# Altium PCB MOD-ADC-10.PCBDOC (part 4 of 4)
Units mm, origin at the board's own origin, x right, y up, seen from the top; angles counter-clockwise.
Board outline 80 x 100 mm, 4 copper layers (L1, P2, L3, L4), stack 1.512 mm thick; 199 components, 170 nets, 717 pads, 298 vias.
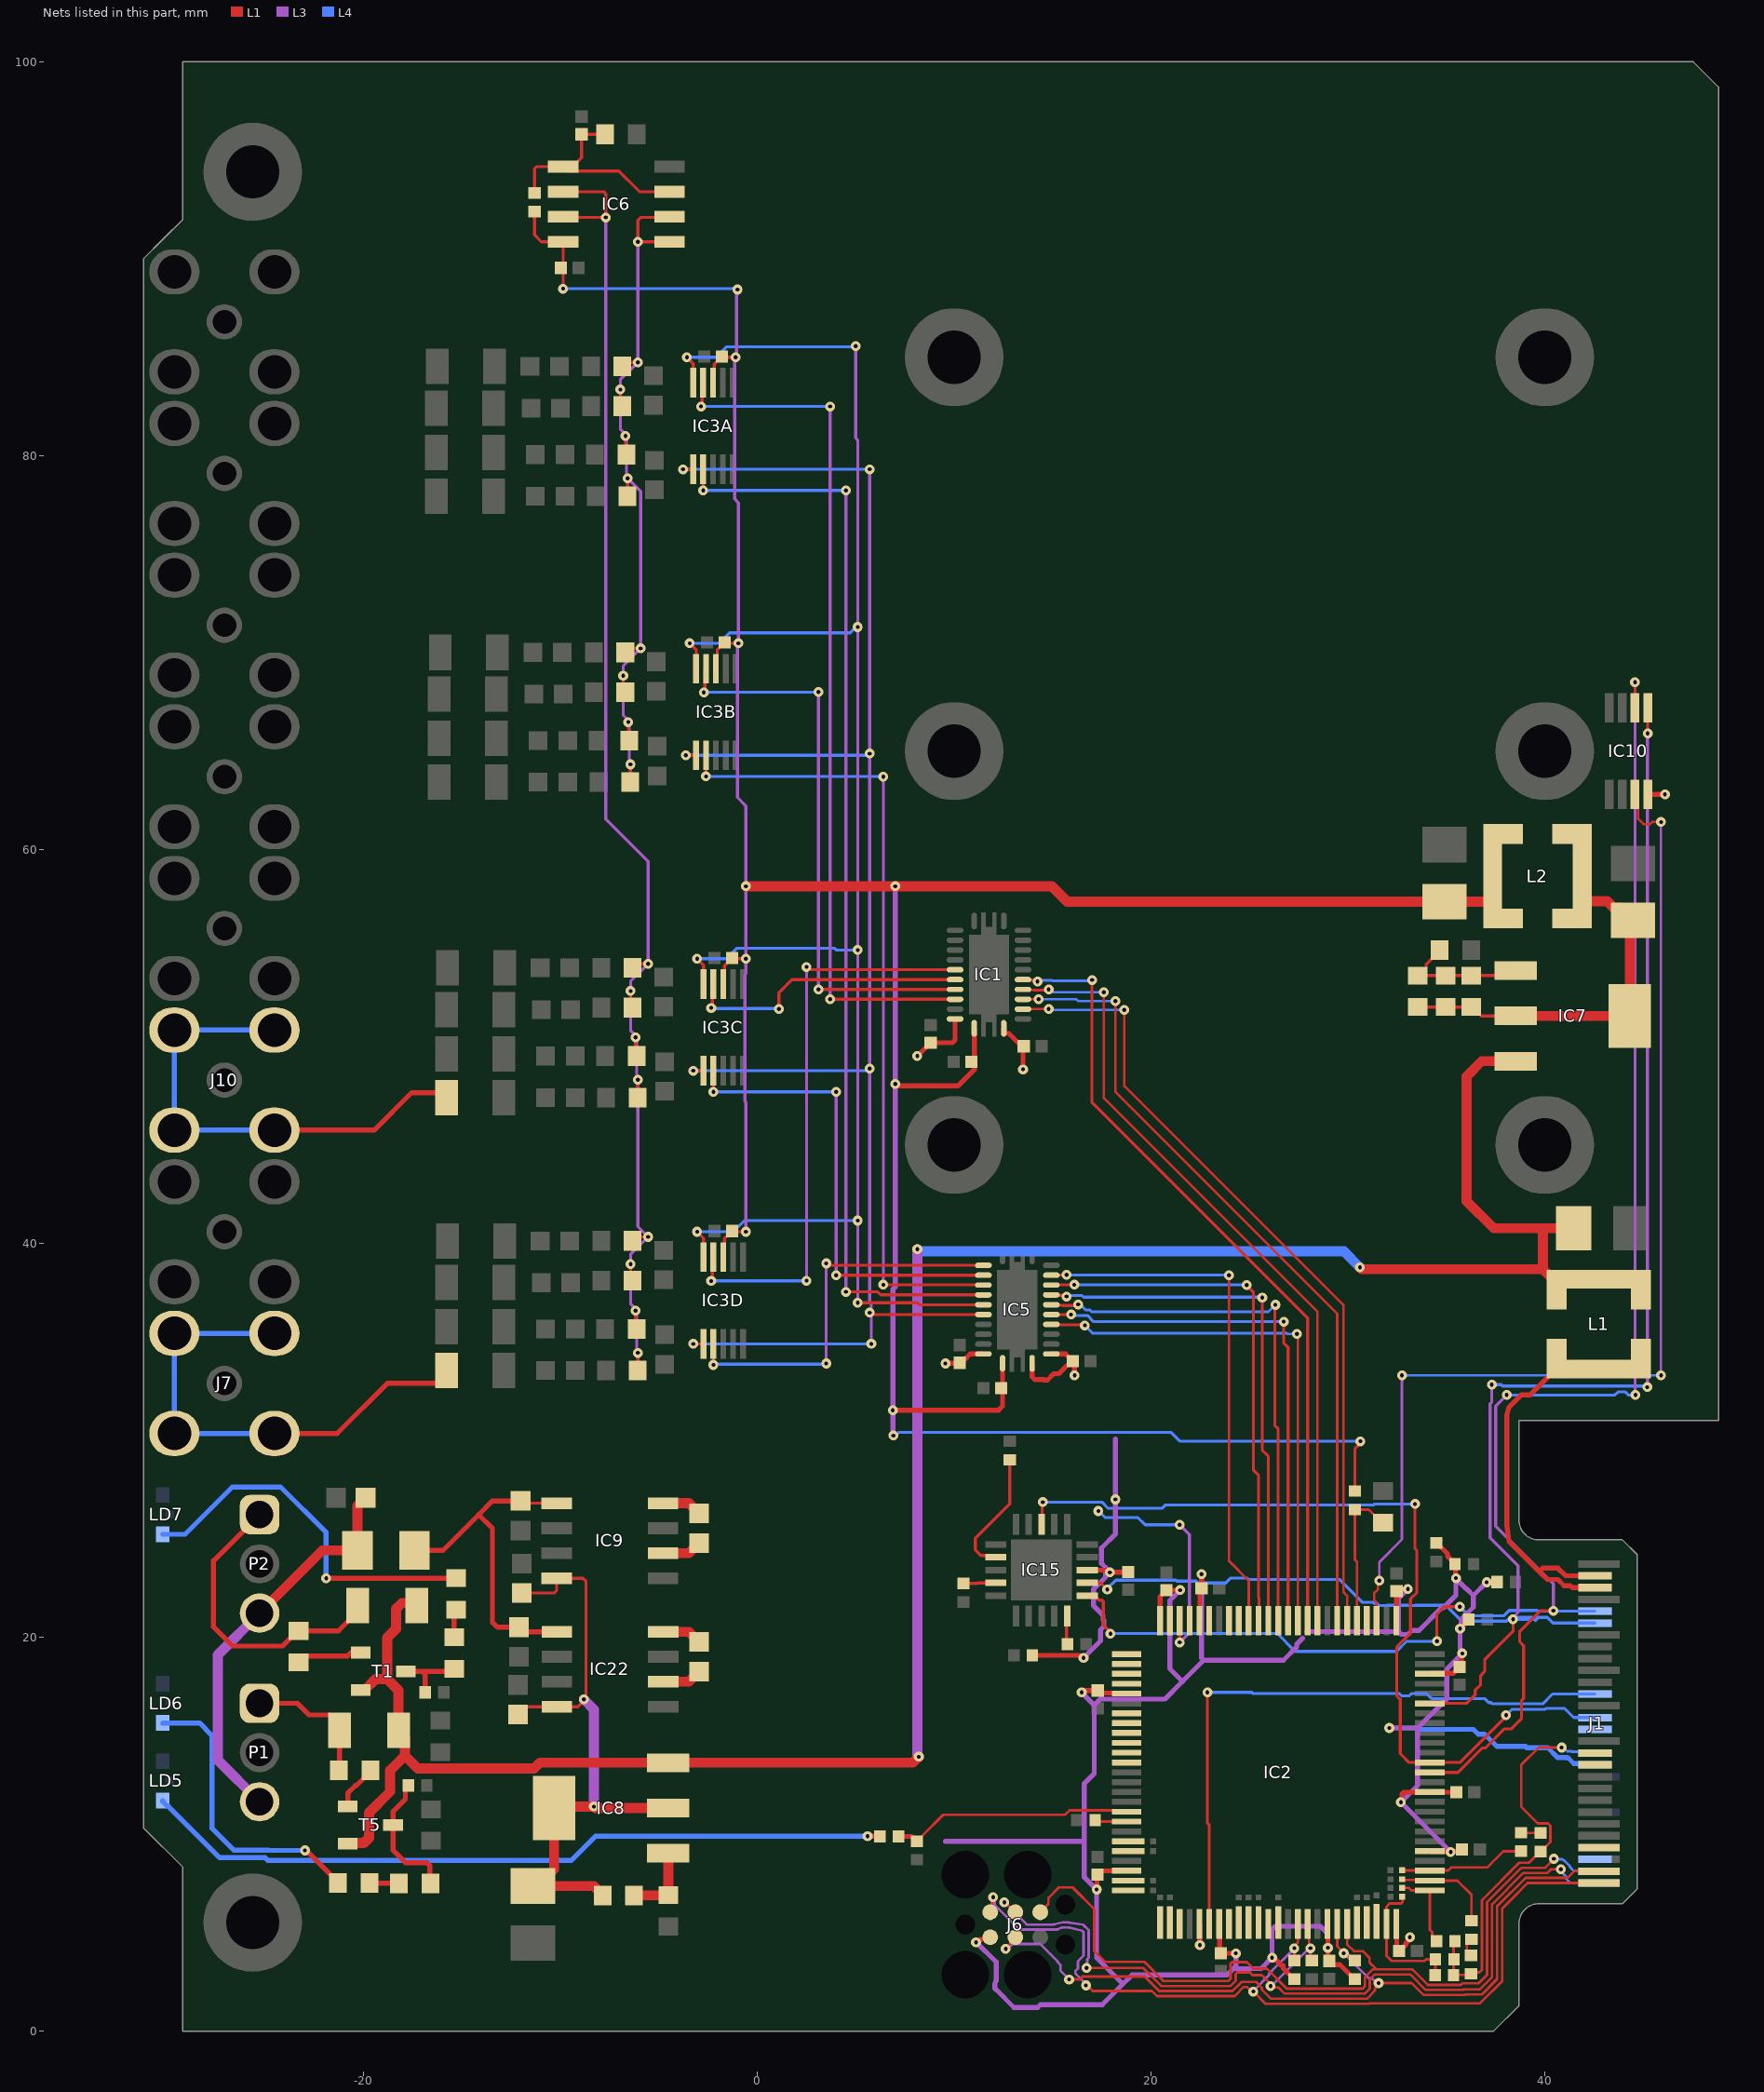
[diagram p5: the nets of this part, all layers, seen from the top]

## Via types
v1: diameter 0.5, hole 0.2, L1 to L4, tented both sides, 290 vias
v2: diameter 0.5, hole 0.2, L1 to L4, 8 vias

## Nets (pads, with @x,y where several pads share a name; then routed paths per layer and width w, separated by ;. In a path a pad name is that pad's centre, name@x,y a point inside that pad or via, vN(x,y) a via of type N, cw(c..) or ccw(c..) an arc to the next point about the centre after c; other vN are vias at no path point) (continued)
IN2C_N: J10.2 J10.3 J10.4 J10.5 R6C.1 | length 24.9
  L1 w0.254: J10.3@-24.528,45.751 -19.461,45.751 -17.557,47.655 -16.03,47.655 R6C.1@-15.781,47.407
  L4 w0.254: J10.3@-24.528,45.751 J10.4@-29.608,45.751 J10.5@-29.608,50.831 J10.2@-24.528,50.831
IN2D_N: J7.2 J7.3 J7.4 J7.5 R6D.1 | length 25.4
  L1 w0.254: J7.3@-24.528,30.348 -21.34,30.348 -18.8,32.888 -16.229,32.888 -15.781,33.336 R6D.1@-15.781,33.539
  L4 w0.254: J7.3@-24.528,30.348 J7.4@-29.608,30.348 J7.5@-29.608,35.428 J7.2@-24.528,35.428
LEDERR0: LD6.2 R31.1 | length 15.1
  L1 w0.254: v1(-22.977,9.174) -22.912,9.174 -21.3,7.562 R31.1@-21.3,7.512
  L4 w0.254: LD6.2@-30.2,15.644 -28.333,15.644 -27.705,15.015 -27.705,10.305 -26.581,9.181 -24.842,9.181 -24.835,9.174 v1(-22.977,9.174)
LEDERR1: LD7.2 R33.1 | length 19.2
  L1 w0.254: v1(-21.9,22.994) -15.306,22.994 R33.1@-15.3,23
  L4 w0.254: LD7.2@-30.2,25.223 -29.068,25.223 -26.668,27.623 -24.212,27.623 -21.9,25.312 v1(-21.9,22.994)
Module_EN: IC2.14 IC15.3 J1.B14 | length 44.9
  L1 w0.152: IC15.3@14.432,25.732 14.465,25.766 14.465,26.829 v1(14.498,26.862) ; v1(33.404,26.767) 33.404,24.512 33.494,24.422 33.494,22.26 33.175,21.941 33.175,20.205 32.479,19.509 32.479,17.019 32.655,16.843 32.655,14.091 33.109,13.638 IC2.14@34.154,13.638 35.687,13.638 38.029,15.98 v1(38.029,16.038)
  L4 w0.152: v1(14.498,26.862) 17.504,26.862 17.819,26.546 20.546,26.546 20.709,26.709 31.29,26.709 31.348,26.767 v1(33.404,26.767) ; v1(38.029,16.038) 38.327,16.336 40.005,16.336 40.054,16.385 41.001,16.385 41.46,15.926 42.541,15.926 J1.B14@42.548,15.918
N10V0: C49.2 L4.2 P1.3 P2.3 | length 20.5
  L1 w0.508: P2.3@-25.283,21.223 -22.096,24.411 L4.2@-20.31,24.411 -20.31,26.668 C49.2@-19.9,27.078
  L3 w0.508: P1.3@-25.283,11.644 -27.4,13.761 -27.4,19.107 P2.3@-25.283,21.223
NetC31_2: C31.2 IC6.3 IC6.5 R21.1 R24.2 | length 12.2
  L1 w0.152: R21.1@-11.315,93.34 -11.315,94.586 -11.225,94.675 IC6.5@-9.865,94.675 ; R24.2@-7.726,96.32 C31.2@-8.926,96.32 -8.926,95.138 -9.39,94.675 IC6.5@-9.865,94.675 ; IC6.3@-4.465,93.405 -5.986,93.405 -7.033,94.451 -9.641,94.451 IC6.5@-9.865,94.675
NetC32_1: C32.1 IC9.2 | length 2.1
  L1 w0.508: IC9.2@-4.794,24.264 -3.474,24.264 C32.1@-2.954,24.784
NetC32_2: C32.2 IC9.4 | length 2.1
  L1 w0.508: IC9.4@-4.794,26.804 -3.474,26.804 C32.2@-2.954,26.284
NetC33_2: C33.2 C48.2 IC9.5 IC22.5 L4.1 | length 17.4
  L1 w0.152: C33.2@-11.91,26.804 IC9.5@-10.194,26.804
  L1 w0.254: L4.1@-17.41,24.411 -15.965,24.411 -14.152,26.223 ; C33.2@-11.967,26.862 C33.2@-12.025,26.919 -13.456,26.919 -14.152,26.223 ; IC22.5@-10.186,20.277 -11.885,20.277 C48.2@-12.115,20.507 -13.196,20.507 -13.456,20.768 -13.456,25.528 -14.152,26.223
NetC47_1: C47.1 IC22.2 | length 2
  L1 w0.508: IC22.2@-4.786,17.737 -3.475,17.737 C47.1@-2.955,18.257
NetC47_2: C47.2 IC22.4 | length 2
  L1 w0.508: IC22.4@-4.786,20.277 -3.475,20.277 C47.2@-2.955,19.757
NetF1_1: F1.1 P1.1 R35.2 | length 6.9
  L1 w0.254: P1.1@-25.283,16.644 -23.352,16.644 -22.759,16.051 -21.673,16.051 -21.225,15.603 F1.1@-21.225,15.278 -21.225,13.257 R35.2@-21.25,13.232
NetF2_1: F2.1 P2.1 R27.2 | length 15.4
  L1 w0.254: P2.1@-25.283,26.223 -27.626,23.881 -27.626,20.526 -26.65,19.55 -24.119,19.55 -23.35,20.319 R27.2@-23.3,20.319 -21.273,20.319 -20.3,21.293 F2.1@-20.3,21.618
NetIC2_30: IC2.30 R22.1 R23.2 | length 7.4
  L1 w0.13: IC2.30@30.454,20.838 30.454,23.839 30.353,23.94 R22.1@30.353,26.482 31.065,26.482 31.729,25.818 R23.2@31.779,25.818
NetIC2_67: IC2.67 R34.2 R48.1 | length 12.4
  L1 w0.13: R48.1@8.116,9.638 8.341,9.863 8.341,9.883 9.441,10.982 15.624,10.982 15.853,11.21 18.681,11.21 IC2.67@18.754,11.138
  L1 w0.254: R34.2@7.17,9.883 7.831,9.883 8.076,9.638 R48.1@8.096,9.638
NetIC2_68: IC2.68 R47.1 | length 1.6
  L1 w0.13: R47.1@17.162,10.708 17.233,10.638 IC2.68@18.754,10.638
NetIC7_1: IC7.1 R16.2 R17.2 R18.2 R19.2 | length 6.9
  L1 w0.152: R18.2@34.658,54.899 34.658,54.849 33.962,54.153 33.962,53.975 33.588,53.601 R17.2@33.538,53.601 R19.2@34.958,53.601 R16.2@36.258,53.601 38.267,53.601 IC7.1@38.517,53.851
NetIC8_1: IC8.1 R3.2 R20.1 | length 3.9
  L1 w0.508: R20.1@-6.26,6.872 -6.242,6.89 -4.542,6.89 R3.2@-4.525,6.908 IC8.1@-4.525,9.024
NetIC15_7: IC15.7 R77.2 | length 6.5
  L1 w0.152: IC15.7@12.108,24.058 12.018,24.147 11.362,24.147 11.073,24.436 11.073,25.019 12.822,26.767 R77.2@12.822,29.011
NetIC15_9: IC15.9 R79.2 | length 1.7
  L1 w0.152: R79.2@10.467,22.73 11.162,22.73 11.19,22.758 IC15.9@12.108,22.758
NetIC15_15: IC15.15 R78.1 | length 1.5
  L1 w0.152: IC15.15@15.732,21.084 15.703,21.056 15.703,19.687 R78.1@15.752,19.638
NetJ1_B17: J1.B17 R58.1 R60.1 R62.1 R63.1 R64.1 | length 20.6
  L1 w0.13: R62.1@35.42,4.584 35.364,4.527 35.364,3.637 R64.1@35.364,2.847 36.184,2.847 36.314,2.976 36.675,2.976 36.803,3.104 36.803,6.647 38.702,8.546 39.183,8.546 39.754,9.118 R58.1@39.774,9.118 39.794,9.118 40.276,9.6 40.276,10.427 40.154,10.549 39.637,10.549 38.798,11.388 38.798,13.511 39.683,14.396 v1(40.849,14.396)
  L4 w0.13: v1(40.849,14.396) 40.949,14.396 41.134,14.211 41.329,14.211 41.357,14.183 42.483,14.183 J1.B17@42.548,14.118
NetR25_2: R25.2 R30.2 T5.3 | length 6.7
  L1 w0.254: R25.2@-17.724,12.471 -17.874,12.32 -17.874,11.78 -18.5,11.154 T5.3@-18.5,10.461 -18.5,9.174 -17.875,8.549 -16.784,8.549 -16.635,8.401 -16.635,7.535 R30.2@-16.6,7.5
NetR27_1: R27.1 T1.1 | length 2.9
  L1 w0.254: R27.1@-23.3,18.719 -22.977,19.042 -20.825,19.042 -20.65,19.217
NetR28_2: R28.2 R32.2 T1.3 | length 3.6
  L1 w0.254: T1.3@-17.85,18.267 -17.04,18.267 ; R28.2@-16.87,17.2 -16.87,18.097 -17.04,18.267 ; R32.2@-15.4,18.4 -15.533,18.267 -17.04,18.267
NetR30_1: R30.1 R31.2 | length 1.5
  L1 w0.254: R31.2@-19.7,7.512 -19.688,7.5 R30.1@-18.2,7.5
NetR32_1: R32.1 R33.2 | length 1.4
  L1 w0.254: R32.1@-15.4,20 -15.4,21.3 R33.2@-15.3,21.4
NetR35_1: R35.1 T5.1 | length 2.3
  L1 w0.254: T5.1@-20.8,11.411 -20.8,12.082 -20.412,12.471 -20.362,12.471 -19.65,13.182 R35.1@-19.65,13.232
NetR58_2: R58.2 R59.1 | length 1
  L1 w0.13: R59.1@38.798,10.072 38.812,10.058 R58.2@39.774,10.058
NetR60_2: R60.2 R61.1 | length 0.8
  L1 w0.13: R61.1@36.034,4.569 36.034,3.986 R60.2@36.209,3.811
P3V3MP: C2.2 C3.2 C4.2 C5.2 C11.2 C16.2 C17.2 C18.2 C20.2 C22.2 C23.2 C24.2 C25.2 C26.2 C29.2 C30.2 IC1.1 IC1.23 IC2.5 IC2.11 IC2.23 IC2.26 IC2.46 IC2.50 IC2.55 IC2.73 IC2.80 IC2.82 IC2.93 IC2.100 IC5.1 IC5.2 IC5.23 IC10.8 IC15.18 J1.B18 J6.1 R2.2 R8.1 R9.1 R10.1 R11.1 R76.2 R80.2 | length 177.3
  L1 w0.25: v1(8.126,49.516) 8.129,49.516 C16.2@8.8,50.187 9.896,50.187 10.043,50.333 IC1.23@10.043,51.397 ; v1(9.553,33.9) 9.57,33.918 10.269,33.918 C26.2@10.287,33.935 10.472,34.12 10.548,34.12 10.813,34.385 IC5.23@11.481,34.385 ; v1(11.108,4.501) 11.175,4.501 11.334,4.66 11.725,4.66 J6.1@11.83,4.765 ; IC1.1@12.518,50.922 12.518,50.679 12.532,50.665 12.774,50.665 13.241,50.199 13.347,50.199 13.494,50.051 v1(13.494,48.839) ; IC5.1@13.956,33.91 13.956,33.226 14.103,33.079 14.544,33.079 14.559,33.064 14.736,33.064 15.055,33.383 15.313,33.383 15.944,34.014 C22.2@16.022,34.014 ; R76.2@13.97,19.074 16.377,19.074 16.5,18.951 v1(16.567,18.951) ; IC5.2@14.931,34.385 15.651,34.385 C22.2@16.022,34.014 ; v1(16.113,33.3) 16.113,33.923 C22.2@16.022,34.014 ; v1(16.472,17.195) 16.539,17.195 16.636,17.292 C4.2@17.289,17.292 17.419,17.163 18.729,17.163 IC2.55@18.754,17.138 ; IC15.18@16.756,23.408 17.72,23.408 17.839,23.29 v1(17.906,23.29) 17.92,23.303 18.818,23.303 C30.2@18.832,23.317 ; v1(17.233,7.188) 17.252,7.207 17.252,7.931 C20.2@17.272,7.95 17.459,8.138 IC2.73@18.754,8.138 ; v1(18.191,27) v1@18.238,26.952 ; IC2.50@20.454,20.838 20.454,22.061 C3.2@20.777,22.384 20.782,22.388 21.467,22.388 v1(21.472,22.393) ; IC2.80@22.454,5.438 22.467,5.425 22.467,4.375 v1(22.479,4.363) ; IC2.46@22.454,20.838 22.479,20.863 22.479,22.402 C25.2@22.561,22.483 v1(22.561,23.206) ; IC2.82@23.454,5.438 23.479,5.413 23.479,4.001 C11.2@23.533,3.947 v1(24.304,3.947) ; v1(26.146,3.728) 26.214,3.728 26.606,3.335 26.713,3.335 26.713,3.183 26.95,2.946 26.95,2.943 27.255,2.638 R2.2@27.275,2.638 ; IC2.93@28.954,5.438 28.979,5.413 v1(28.979,4.227) 28.979,3.633 C24.2@29.054,3.558 29.239,3.373 29.598,3.373 30.333,2.638 R80.2@30.353,2.638 ; IC2.100@32.454,5.438 32.479,5.413 32.479,4.185 C29.2@32.604,4.06 32.942,4.398 32.942,4.474 33.041,4.573 33.041,4.659 v1(33.144,4.763) ; IC2.26@32.454,20.838 32.46,20.843 32.46,22.34 32.521,22.4 32.993,22.4 v1(33.041,22.448) ; v1(32.686,11.619) 32.734,11.667 32.734,12.03 32.833,12.128 C18.2@35.511,12.128 ; IC2.5@34.154,9.138 34.178,9.114 v1@35.111,9.114 ; IC2.23@34.154,18.138 34.179,18.163 35.336,18.163 C2.2@35.666,18.492 35.759,18.586 35.759,19.13 v1(35.807,19.178) ; R8.1@34.493,24.783 34.513,24.783 35.055,24.241 35.055,24.118 35.459,23.715 35.459,23.023 v1(35.482,22.999) ; v1(35.217,9.091) 35.265,9.138 35.705,9.138 C23.2@35.796,9.229 ; v1(35.693,20.434) 35.699,20.434 R11.1@36.136,20.871 ; v1(37.042,22.789) 37.05,22.797 37.56,22.797 R10.1@37.568,22.805 ; IC10.8@45.225,62.8 v1(46.1,62.8)
  L3 w0.25: 9.555,9.641 9.556,9.64 16.609,9.64 ; v1(11.108,4.501) 11.139,4.501 12.134,3.506 12.134,2.561 12.098,2.525 12.065,2.373 12.065,2.165 12.138,2.092 13.036,1.195 14.238,1.195 14.386,1.343 17.523,1.343 18.567,2.388 ; v1(16.472,17.195) 17.111,16.556 ; v1(16.567,18.951) 17.432,19.816 17.432,20.383 17.606,20.557 17.606,20.84 17.564,20.882 17.564,21.114 17.072,21.606 17.072,22.439 17.691,23.058 17.691,23.536 ; v1(17.906,23.29) 17.906,23.321 17.691,23.536 ; 18.191,30.074 v1(18.191,27) 18.191,25.245 17.476,24.53 17.476,23.751 17.691,23.536 ; v1(21.472,22.393) 20.952,21.873 20.952,18.389 21.592,17.749 ; v1(22.561,23.206) 22.561,18.94 22.672,18.829 ; v1(24.304,3.947) 24.304,3.298 24.172,3.166 ; 27.699,19.958 27.395,19.654 27.395,19.503 26.722,18.829 22.672,18.829 ; 27.933,20.284 32.576,20.284 ; v1(28.979,4.227) 28.979,4.941 28.604,5.316 26.304,5.316 26.146,5.158 v1(26.146,3.728) 25.584,3.166 24.172,3.166 ; v1(32.099,15.389) 33.53,15.389 ; v1(33.041,22.448) 32.576,21.984 32.576,20.284 ; v1(35.217,9.091) v1(35.217,9.091) v1(32.686,11.619) v1(32.686,11.619) 33.53,12.463 33.53,15.389 ; v1(35.482,22.999) 35.475,22.991 35.475,22.13 34.834,21.488 34.756,21.488 33.613,20.345 33.246,20.345 33.038,20.138 32.723,20.138 32.576,20.284 ; v1@35.484,22.977 35.999,22.462 36.02,22.462 36.367,22.115 ; v1(37.042,22.789) 36.367,22.115 ; 16.609,9.64 16.609,12.576 17.111,13.078 17.111,16.556 ; 16.609,9.64 16.609,7.811 v1(17.233,7.188) 17.233,3.722 18.567,2.388 ; 17.111,16.556 17.415,16.86 20.703,16.86 21.592,17.749 ; 18.567,2.388 19.025,2.845 23.851,2.845 24.172,3.166 ; 21.592,17.749 22.672,18.829 ; 33.53,15.389 35.024,16.884 35.024,18.395 v1(35.807,19.178) 35.807,19.245 35.693,19.36 v1(35.693,20.434) 35.736,20.477 35.736,20.892 36.367,21.524 36.367,22.115
  L4 w0.25: v1(32.099,15.389) 33.544,15.389 33.61,15.324 36.364,15.324 36.615,15.072 36.95,15.072 37.564,14.458 39.009,14.458 39.081,14.386 40.149,14.386 40.641,13.894 41.109,13.894 41.137,13.866 41.189,13.866 41.472,13.583 42.483,13.583 J1.B18@42.548,13.518
P5V0: C13.1 IC7.2 IC7.4 L2.1 R16.1 R17.1 R19.1 | length 19.6
  L1 w0.152: R17.1@33.538,52.001 R19.1@34.958,52.001 R16.1@36.258,52.001 ; R16.1@36.308,52.001 36.758,51.551 IC7.2@38.517,51.551
  L1 w0.508: IC7.2@38.517,51.551 IC7.4@43.974,51.551 ; L2.1@41.9,58.643 41.9,57.598 42.121,57.377 43.166,57.377 43.499,57.044 43.829,57.044 C13.1@44.475,56.398 44.317,56.24 IC7.4@44.317,51.551
P5V0A: C14.1 C19.2 C27.2 C28.2 C35A.2 C35B.2 C35C.2 C35D.2 IC1.24 IC3A.8 IC3B.8 IC3C.8 IC3D.8 IC5.24 IC6.8 L2.2 R21.2 R22.2 | length 179.4
  L1 w0.152: R21.2@-11.315,92.4 -11.315,91.207 -10.973,90.865 IC6.8@-9.865,90.865 v1(-9.865,88.483) ; IC3A.8@-2.25,83.709 -2.187,83.772 -2.187,84.652 C35A.2@-1.8,85.038 -1.762,85 v1(-1.1,85) ; IC3B.8@-2.106,69.183 -2.043,69.246 -2.043,70.126 C35B.2@-1.656,70.512 -1.618,70.474 v1(-0.956,70.474) ; IC3D.8@-1.731,39.298 -1.668,39.362 -1.668,40.241 C35D.2@-1.281,40.628 -1.243,40.589 v1(-0.581,40.589) ; IC3C.8@-1.731,53.166 -1.668,53.229 -1.668,54.108 C35C.2@-1.281,54.495 -1.243,54.457 v1(-0.581,54.457) ; R22.2@30.353,27.422 30.353,29.579 30.631,29.857 v2(30.631,29.951)
  L1 w0.254: v1(6.88,31.527) 12.245,31.527 12.456,31.737 IC5.24@12.456,33.91 ; v1(7,48.1) 7.067,48.1 7.171,47.996 10.186,47.996 11.018,48.828 IC1.24@11.018,50.922
  L1 w0.508: v1(-0.581,58.137) v1(7,58.137) 14.957,58.137 15.745,57.348 C14.1@34.9,57.348 37.129,57.348 37.35,57.569 L2.2@37.35,58.643
  L3 w0.152: v1(-1.01,88.438) -1.055,88.393 -1.055,85.045 v1(-1.1,85) -1.153,84.947 -1.153,77.802 -0.956,77.605 v1(-0.956,70.474) -1.01,70.421 -1.01,62.646 -0.581,62.218 v1(-0.581,58.137) v1(-0.581,54.457) -0.581,53.694 -0.634,53.641 -0.634,47.222 -0.581,47.169 v1(-0.581,40.589)
  L3 w0.254: v2(6.91,30.241) 6.88,30.271 6.88,37.667 7,37.787 v1(7,48.1) v1(7,58.137)
  L4 w0.152: v1(-9.865,88.483) v1@-1.144,88.483 ; v2(6.91,30.241) 7.005,30.241 7.164,30.4 21.033,30.4 21.482,29.951 v2(30.631,29.951)
P10V0: C15.1 C34.2 C50.2 IC8.2 IC8.4 IC9.8 IC22.8 R20.2 | length 33.3
  L1 w0.152: C50.2@-12.155,16.077 -11.765,16.467 IC22.8@-10.186,16.467 -9.116,16.467 -8.697,16.886 -8.697,22.839 -8.782,22.924 -8.852,22.994 IC9.8@-10.194,22.994 -10.194,22.374 -10.325,22.244 C34.2@-11.961,22.244
  L1 w0.508: C15.1@-11.4,7.366 -8.304,7.366 -7.86,6.922 R20.2@-7.86,6.872 ; C15.1@-11.175,7.366 -10.325,8.216 IC8.4@-10.325,11.324 -10.249,11.4 v1(-8.3,11.4) -8.224,11.324 IC8.2@-4.525,11.324
  L3 w0.508: v1(-8.813,16.844) -8.3,16.33 v1(-8.3,11.4)
P12V0: J1.A2 J1.A3 L1.1 | length 20.6
  L1 w0.25: J1.A3@42.548,22.518 41.395,22.518 41.298,22.615 40.976,22.615 40.661,22.93 40.125,22.93 39.719,23.336 ; J1.A2@42.548,23.118 41.052,23.118 40.663,23.507 39.89,23.507 39.719,23.336 ; L1.1@42.738,33.624 40.563,33.624 39.239,32.3 38.798,32.3 38.249,31.751 38.176,31.678 38.063,31.259 38.063,25.685 38.176,24.879 38.249,24.806 39.719,23.336
P12V0A: C12.1 F1.2 F2.2 IC7.3 IC8.3 L1.2 T1.2 T5.2 | length 122.8
  L1 w0.152: L1.2@40.595,37.174 L1.2@40.595,38.174
  L1 w0.508: T5.2@-20.8,9.511 -20.754,9.557 -19.977,9.557 -19.725,9.808 -19.725,11.086 -18.65,12.161 -18.65,13.24 -17.904,13.986 ; T1.2@-20.15,17.317 -19.95,17.317 -19.389,17.878 -18.8,17.878 ; F2.2@-17.3,21.618 -17.426,21.744 -18.052,21.744 -18.35,21.446 -18.35,20.427 -18.8,19.977 -18.8,17.878 ; v1(8.2,13.931) 7.894,13.624 IC8.3@-4.525,13.624 -11.045,13.624 -11.333,13.336 -17.254,13.336 -17.904,13.986 ; v1(30.604,38.786) 30.698,38.693 39.902,38.693 ; IC7.3@38.517,49.251 36.796,49.251 36.025,48.479 36.025,42.145 37.405,40.765 39.902,40.765 ; C12.1@41.459,40.765 39.902,40.765 ; L1.2@42.738,38.174 40.595,38.174 40.374,38.395 40.2,38.395 39.902,38.693 ; -18.8,17.878 -18.225,17.303 F1.2@-18.225,15.278 -17.904,14.957 -17.904,13.986 ; 39.902,38.693 39.902,40.765
  L3 w0.508: v1(8.129,39.7) 8.129,14.002 v1(8.2,13.931)
  L4 w0.508: v1(8.129,39.7) 8.229,39.6 29.79,39.6 v1(30.604,38.786)
Payload_EN: IC2.29
PPS: J1.B15
PROJECT_ID0: IC2.83
PROJECT_ID1: IC2.78
PROJECT_ID2: IC2.77 NT19.1
PROJECT_ID3: IC2.76 NT12.1
PROJECT_ID4: IC2.75 NT9.1
PROJECT_ID5: IC2.74 NT20.1
PROJECT_ID6: IC2.71 NT10.1
PROJECT_ID7: IC2.70 NT11.1
PWR_REQ0: IC2.3 NT1.1 R59.2 | length 6.5
  L1 w0.13: NT1.1@32.754,8.167 32.769,8.152 34.14,8.152 IC2.3@34.154,8.138 34.177,8.161 35.099,8.161 35.247,8.308 37.061,8.308 37.885,9.132 R59.2@38.798,9.132
PWR_REQ1: IC2.2 NT2.1 R61.2 | length 5.2
  L1 w0.13: NT2.1@32.754,7.71 32.79,7.674 34.118,7.674 IC2.2@34.154,7.638 35.558,7.638 36.271,6.925 R61.2@36.271,5.601
PWR_REQ2: IC2.1 NT3.1 R62.2 | length 4.2
  L1 w0.13: NT3.1@32.754,7.266 33.096,7.266 33.096,7.26 33.218,7.138 IC2.1@34.154,7.138 34.154,5.141 34.268,5.027 34.268,4.796 R62.2@34.493,4.571
PWR_REQ3: IC2.99 NT4.1 R63.2 R64.2 | length 7.1
  L1 w0.13: NT4.1@32.754,6.816 32.769,6.801 32.769,6.538 32.705,6.474 32.112,6.474 31.954,6.316 IC2.99@31.954,5.438 31.954,3.818 32.215,3.558 33.894,3.558 33.973,3.637 R63.2@34.443,3.637 34.443,2.866 R64.2@34.424,2.847
REG_IN0: IC2.42
REG_IN1: IC2.43
REG_IN2: IC2.45
REG_IN3: IC2.47
REG_IN4: IC2.48 | length 11.9
  L1 w0.152: v1(21.454,19.738) IC2.48@21.454,20.838
  L3 w0.152: v1(21.454,19.738) 21.947,20.23 21.947,25.22 v1(21.454,25.713)
  L4 w0.152: v1(17.318,26.406) 17.335,26.406 17.665,26.076 19.329,26.076 19.693,25.713 v1(21.454,25.713)
REG_IN5: IC2.49
REG_IN6: IC2.51
REG_IN7: IC2.52
REG_OUT0: IC2.53
REG_OUT1: IC2.54
REG_OUT2: IC2.57
REG_OUT3: IC2.58
REG_OUT4: IC2.59
REG_OUT5: IC2.60
REG_OUT6: IC2.61
REG_OUT7: IC2.62
RESETn: IC2.81 J1.B12 | length 32
  L1 w0.152: v1(22.861,17.203) 22.861,10.551 22.954,10.458 IC2.81@22.954,5.438
  L4 w0.152: v1(22.861,17.203) 25.113,17.203 25.178,17.138 32.611,17.138 32.728,17.021 33.103,17.021 33.22,17.138 33.992,17.138 34.246,16.884 36.937,16.884 37.145,16.676 37.269,16.676 37.329,16.616 39.89,16.616 40.393,17.118 J1.B12@42.548,17.118
REV_ID0: IC2.98 NT13.1
REV_ID1: IC2.97 NT14.1
REV_ID2: IC2.96 NT15.1
REV_ID3: IC2.88 NT16.1
REV_ID4: IC2.87
REV_ID5: IC2.86 NT5.1
REV_ID6: IC2.85 NT6.1
REV_ID7: IC2.84 NT7.1
SCL: IC2.13 IC10.2 IC15.16 J1.B5 | length 98.9
  L1 w0.152: IC15.16@16.756,22.108 17.124,22.108 17.352,21.881 17.507,21.881 17.574,21.814 17.574,20.624 17.934,20.263 v1(17.934,20.175) ; IC2.13@34.154,13.138 35.581,13.138 36.818,14.374 36.985,14.374 37.959,15.348 38.312,15.348 38.807,15.842 38.807,16.775 38.924,16.891 38.924,19.563 38.723,19.763 38.723,20.299 39.768,21.344 v1(40.433,21.344) ; v1(34.517,19.798) 34.51,19.805 34.51,21.174 34.885,21.549 v1(35.683,21.549) ; IC10.2@44.575,67.2 v1(44.575,68.5)
  L3 w0.152: v1(38.061,32.3) 37.5,31.739 37.5,25.636 40.433,22.703 v1(40.433,21.344) ; v1(44.575,68.5) 44.588,68.488 44.588,32.312 v1(44.6,32.3)
  L4 w0.152: v1(17.934,20.175) 17.95,20.191 26.413,20.191 27.32,19.284 32.473,19.284 32.975,19.787 34.507,19.787 v1(34.517,19.798) ; v1(35.683,21.549) 36.138,21.094 37.93,21.094 38.196,21.36 39.601,21.36 39.643,21.318 J1.B5@42.548,21.318 ; v1(38.061,32.3) 43.559,32.3 43.712,32.453 44.088,32.453 44.241,32.3 v1(44.6,32.3)
SDA: IC2.20 IC10.1 IC15.17 J1.B6 | length 91.1
  L1 w0.152: IC15.17@16.756,22.758 17.442,22.758 v1(17.772,22.429) ; IC2.20@34.154,16.638 36.013,16.638 36.458,17.082 36.458,17.311 36.737,17.59 36.737,18.059 36.94,18.262 36.94,18.851 38.384,20.295 v1(38.384,20.906) ; v1(45.225,65.9) IC10.1@45.225,67.2
  L3 w0.152: v1(37.305,32.825) 37.305,31.938 37.221,31.854 37.221,25.041 38.635,23.627 38.635,21.252 38.384,21 v1(38.384,20.906) ; v1(45.2,32.7) 45.213,32.712 45.213,65.888 v1(45.225,65.9)
  L4 w0.152: v1(17.772,22.429) 17.772,22.462 18.211,22.901 21.251,22.901 21.306,22.846 22.28,22.846 22.373,22.753 23.798,22.753 24.052,23.008 24.857,23.008 24.939,22.926 29.587,22.926 30.743,21.769 31.29,21.769 31.362,21.696 31.502,21.696 31.591,21.607 31.966,21.607 31.983,21.624 33.03,21.624 33.047,21.607 33.423,21.607 33.44,21.624 34.966,21.624 35.704,20.887 35.881,20.887 35.953,20.815 38.046,20.815 38.241,21.01 39.689,21.01 ; v1(37.305,32.825) 37.788,32.825 37.859,32.753 45.147,32.753 v1(45.2,32.7) ; v1(38.384,20.906) 39.461,20.906 39.523,20.844 39.689,21.01 ; J1.B6@42.548,20.718 40.417,20.718 40.126,21.01 39.689,21.01
SPI_5V_CLK: IC3A.1 IC3B.1 IC3C.1 IC3D.1 IC5.19 | length 89.2
  L1 w0.152: v1(-3.772,79.309) IC3A.1@-3.25,79.309 ; v1(-3.628,64.783) IC3B.1@-3.106,64.783 ; v1(-3.253,34.898) IC3D.1@-2.731,34.898 ; v1(-3.253,48.766) IC3C.1@-2.731,48.766 ; v1(5.7,36.484) 5.794,36.484 5.893,36.385 IC5.19@11.481,36.385
  L3 w0.152: v1(5.7,79.309) v2(5.7,64.873) v2(5.7,48.881) 5.7,36.977 5.79,36.888 v2(5.79,34.898)
  L4 w0.152: v1(-3.772,79.309) v1(5.7,79.309) ; v1(-3.628,64.783) 5.61,64.783 v2(5.7,64.873) ; v1(-3.253,34.898) v2(5.79,34.898) ; v1(-3.253,48.766) 5.49,48.766 5.606,48.881 v2(5.7,48.881)
SPI_5V_CSn0: IC3A.2 IC5.17 | length 56.1
  L1 w0.152: v1(-2.75,78.24) IC3A.2@-2.75,79.309 ; v1(4.5,37.54) 6.12,37.54 6.274,37.385 IC5.17@11.481,37.385
  L3 w0.152: v1(4.5,37.54) v1(4.5,78.24)
  L4 w0.152: v1(-2.75,78.24) v1(4.5,78.24)
SPI_5V_CSn1: IC3B.2 IC5.16 | length 41
  L1 w0.152: v2(-2.606,63.714) IC3B.2@-2.606,64.783 ; v1(6.4,37.9) 6.407,37.893 11.474,37.893 IC5.16@11.481,37.885
  L3 w0.152: v1(6.4,37.9) v1(6.4,63.7)
  L4 w0.152: v2(-2.606,63.714) 6.386,63.714 v1(6.4,63.7)
SPI_5V_CSn2: IC3C.2 IC5.15 | length 24.1
  L1 w0.152: v1(-2.231,47.696) IC3C.2@-2.231,48.766 ; v1(4,38.385) IC5.15@11.481,38.385
  L3 w0.152: v1(4,38.385) v1(4,47.696)
  L4 w0.152: v1(-2.231,47.696) v1(4,47.696)
SPI_5V_CSn3: IC3D.2 IC5.14 | length 19.9
  L1 w0.152: v1(-2.231,33.829) IC3D.2@-2.231,34.898 ; v1(3.5,38.984) 3.594,38.984 3.693,38.885 IC5.14@11.481,38.885
  L3 w0.152: v1(3.5,33.9) v1(3.5,38.984)
  L4 w0.152: v1(-2.231,33.829) -2.196,33.864 3.464,33.864 v1(3.5,33.9)
SPI_5V_MISO0: IC1.21 IC3A.9 | length 44.3
  L1 w0.152: v1(-2.862,82.5) -2.806,82.556 -2.806,83.653 IC3A.9@-2.75,83.709 ; v1(3.7,52.397) IC1.21@10.043,52.397
  L3 w0.152: v1(3.7,52.397) v1(3.7,82.5)
  L4 w0.152: v1(-2.862,82.5) v1(3.7,82.5)
SPI_5V_MISO1: IC1.20 IC3B.9 | length 29.1
  L1 w0.152: v1(-2.719,67.974) -2.662,68.03 -2.662,69.127 IC3B.9@-2.606,69.183 ; v1(3.1,52.9) v1(3.1,52.9) 10.041,52.898 IC1.20@10.043,52.897
  L3 w0.152: v1(3.1,52.9) v1(3.1,68)
  L4 w0.152: v1(-2.719,67.974) -2.706,67.987 3.087,67.987 v1(3.1,68)
SPI_5V_MISO2: IC1.19 IC3C.9 | length 14.8
  L1 w0.152: v1(-2.344,51.957) -2.287,52.013 -2.287,53.109 IC3C.9@-2.231,53.166 ; v1(1.091,51.9) 1.091,52.725 1.763,53.397 IC1.19@10.043,53.397
  L4 w0.152: v1(-2.344,51.957) -2.315,51.928 1.063,51.928 v1(1.091,51.9)
SPI_5V_MISO3: IC1.18 IC3D.9 | length 29.5
  L1 w0.152: v1(-2.344,38.089) -2.287,38.146 -2.287,39.242 IC3D.9@-2.231,39.298 ; v1(2.5,54.037) 2.594,54.037 2.734,53.897 IC1.18@10.043,53.897
  L3 w0.152: v1@2.5,38.2 v1(2.5,54.037)
  L4 w0.152: v1(-2.344,38.089) -2.336,38.097 2.492,38.097 v1(2.5,38.104)
SPI_5V_MOSI: IC3A.10 IC3B.10 IC3C.10 IC3D.10 IC5.18 | length 95.3
  L1 w0.152: v1(-3.578,85) -3.25,84.672 IC3A.10@-3.25,83.709 ; v1(-3.434,70.474) -3.106,70.146 IC3B.10@-3.106,69.183 ; v1(-3.059,40.589) -2.731,40.262 IC3D.10@-2.731,39.298 ; v1(-3.059,54.457) -2.731,54.129 IC3C.10@-2.731,53.166 ; v1(5.1,36.984) 8.126,36.984 8.225,36.885 IC5.18@11.481,36.885
  L3 w0.152: v1(5,85.571) 5,80.9 5.1,80.8 v1(5.1,54.896) v1(5.1,41.16) v1(5.1,36.984)
  L4 w0.152: v1(-3.578,85) -2.094,85 -1.559,85.535 4.964,85.535 v1(5,85.571) ; v1(-3.434,70.474) -1.95,70.474 -1.415,71.009 4.715,71.009 5.006,71.3 v2(5.1,71.3) ; v1(-3.059,40.589) -1.222,40.589 -0.652,41.16 v1(5.1,41.16) ; v1(-3.059,54.457) -1.575,54.457 -1.04,54.992 3.903,54.992 3.999,54.896 v1(5.1,54.896)
SPI_CLK: IC2.36 IC5.5 | length 27.3
  L1 w0.13: IC5.5@14.931,35.885 14.957,35.859 16.611,35.859 v1(16.636,35.833) ; v1(27.407,35.407) 27.454,35.36 IC2.36@27.454,20.838
  L4 w0.13: v1(16.636,35.833) 17.027,35.443 26.897,35.443 26.933,35.407 v1(27.407,35.407)
SPI_CSn0: IC2.38 IC5.7 | length 27.8
  L1 w0.152: IC5.7@14.931,36.885 14.955,36.861 15.506,36.861 15.52,36.847 16.247,36.847 v1(16.3,36.9) ; v1(26.31,36.881) 26.283,36.854 26.283,30.745 26.454,30.574 IC2.38@26.454,20.838
  L4 w0.152: v1(16.3,36.9) 16.394,36.9 16.676,36.618 16.888,36.618 16.981,36.525 25.954,36.525 v1(26.31,36.881)
SPI_CSn1: IC2.39 IC5.8 | length 27.4
  L1 w0.152: IC5.8@14.931,37.385 14.955,37.361 15.647,37.361 v1(15.707,37.3) ; v1(25.647,37.245) 25.647,29.487 25.959,29.175 25.959,20.843 IC2.39@25.954,20.838
  L4 w0.152: v1(15.707,37.3) 15.761,37.353 16.488,37.353 16.568,37.273 25.62,37.273 v1(25.647,37.245)
SPI_CSn2: IC2.40 IC5.9 | length 27.2
  L1 w0.152: IC5.9@14.931,37.885 14.939,37.893 16.093,37.893 v1(16.1,37.9) ; v1(24.848,37.885) 25.194,37.54 25.194,28.494 25.454,28.234 25.454,22.019 25.48,21.993 25.48,20.864 IC2.40@25.454,20.838
  L4 w0.152: v1(16.1,37.9) 16.107,37.893 24.841,37.893 v1(24.848,37.885)
SPI_CSn3: IC2.41 IC5.10 | length 27
  L1 w0.13: IC5.10@14.931,38.385 14.939,38.393 15.693,38.393 v1(15.7,38.4) ; v1(23.954,38.385) 23.954,23.869 24.954,22.869 IC2.41@24.954,20.838
  L4 w0.13: v1(15.7,38.4) 15.707,38.393 23.947,38.393 v1(23.954,38.385)
SPI_MISO0: IC1.3 IC2.31 | length 40.9
  L1 w0.127: IC1.3@13.493,51.897 13.494,51.898 14.798,51.898 v1(14.8,51.9) ; v1(18.639,51.859) 18.639,47.991 29.774,36.855 29.774,22.283 29.954,22.103 IC2.31@29.954,20.838
  L4 w0.127: v1(14.8,51.9) 14.841,51.859 v1(18.639,51.859)
SPI_MISO1: IC1.4 IC2.32 | length 40.9
  L1 w0.127: IC1.4@13.493,52.397 13.494,52.398 14.285,52.398 v1(14.287,52.4) ; v1(18.191,52.299) 18.191,47.693 29.454,36.429 IC2.32@29.454,20.838
  L4 w0.127: v1(14.287,52.4) 16.197,52.4 16.299,52.298 18.189,52.298 v1(18.191,52.299)
SPI_MISO2: IC1.5 IC2.34 | length 40.6
  L1 w0.127: IC1.5@13.493,52.897 13.522,52.867 14.038,52.867 14.049,52.857 14.757,52.857 v1(14.8,52.9) ; v1(17.6,52.757) 17.6,47.379 28.454,36.525 IC2.34@28.454,20.838
  L4 w0.127: v1(14.8,52.9) 14.901,52.9 15.044,52.757 v1(17.6,52.757)
SPI_MISO3: IC1.6 IC2.35 | length 40.7
  L1 w0.152: IC1.6@13.493,53.397 13.517,53.372 14.062,53.372 14.137,53.298 v1(14.231,53.298) ; v1(17,53.376) 17,47.153 27.954,36.198 IC2.35@27.954,20.838
  L4 w0.152: v1(14.231,53.298) 14.287,53.353 14.988,53.353 15.004,53.337 16.961,53.337 v1(17,53.376)
SPI_MOSI: IC2.37 IC5.6 | length 27.2
  L1 w0.152: IC5.6@14.931,36.385 v1(15.932,36.385) ; v1(26.737,36.025) 26.737,34.936 26.954,34.719 IC2.37@26.954,20.838
  L4 w0.152: v1(15.932,36.385) 15.979,36.339 16.772,36.339 17.086,36.025 v1(26.737,36.025)
STAT: LD5.2 R34.1 | length 38.2
  L1 w0.254: v1(5.6,9.9) 5.609,9.891 6.221,9.891 R34.1@6.23,9.883
  L4 w0.254: LD5.2@-30.2,11.7 -30.2,11.65 -29.977,11.427 -29.927,11.427 -27.3,8.8 -25,8.8 -24.87,8.67 -9.441,8.67 -8.211,9.9 v1(5.6,9.9)
TCK: IC2.91 J1.B28 J6.4 R1.1 | length 46
  L1 w0.13: v1(12.547,6.54) 12.574,6.54 13.082,6.033 J6.4@13.109,6.033 ; v1(16.721,3.204) 19.599,3.204 20.515,2.288 24.029,2.288 24.292,2.551 24.292,2.898 24.368,2.974 25.018,2.974 25.15,2.842 25.617,2.842 25.882,2.577 25.882,2.573 26.067,2.388 v1(26.067,2.288) 26.137,2.217 26.461,2.217 26.779,1.899 30.849,1.899 31.112,2.162 31.112,2.62 31.371,2.879 33.156,2.879 33.948,2.088 35.839,2.088 35.863,2.112 36.684,2.112 37.317,2.744 37.317,6.434 38.915,8.032 40.129,8.032 40.314,8.217 v1(40.814,8.217) ; IC2.91@27.954,5.438 28.023,5.368 28.023,4.274 v1(28.092,4.205) 28.092,3.803 28.017,3.728 28.014,3.728 R1.1@28.164,3.578
  L3 w0.13: v1(12.547,6.54) 13.678,5.409 15.039,5.409 ; 15.04,5.409 15.392,5.494 cw(c15.655,4.407) 15.818,5.514 16.544,5.409 16.582,5.371 16.824,5.128 16.824,3.714 16.759,3.649 16.759,3.242 v1(16.721,3.204) ; v1(26.067,2.288) 26.121,2.288 28.038,4.205 v1(28.092,4.205)
  L4 w0.13: v1(40.814,8.217) 40.814,8.117 41.067,7.863 41.067,7.75 41.299,7.518 J1.B28@42.748,7.518
TDI: IC2.94 J1.A27 J6.3 R80.1 | length 43.1
  L1 w0.13: v1(12.614,4.171) 12.614,4.22 13.109,4.714 J6.3@13.109,4.763 ; v1(15.837,2.623) 16.371,2.623 16.509,2.762 19.678,2.762 20.409,2.031 24.136,2.031 24.601,2.496 25.329,2.496 25.625,2.2 25.625,2.105 26.088,1.642 27.053,1.642 30.955,1.642 31.369,2.055 31.369,2.152 31.554,2.337 v1(31.554,2.437) 33.235,2.437 33.841,1.831 35.946,1.831 35.97,1.855 36.791,1.855 37.574,2.637 37.574,6.327 39.022,7.775 41.15,7.775 41.493,8.118 J1.A27@42.748,8.118 ; IC2.94@29.454,5.438 29.454,4.311 29.784,3.981 v1(29.784,3.95) 29.854,3.879 30.032,3.879 30.333,3.578 R80.1@30.353,3.578
  L3 w0.13: v1(12.614,4.171) 12.715,4.171 12.968,4.425 14.373,4.425 15.247,3.551 15.247,3.514 15.395,3.366 15.395,3.065 v1(15.837,2.623) ; v1(29.784,3.95) 29.788,3.95 31.066,2.671 31.22,2.671 31.454,2.437 v1(31.554,2.437)
TDO: IC2.95 J1.B27 J6.6 | length 42.8
  L1 w0.13: J6.6@14.379,6.033 14.379,6.056 14.788,6.465 14.788,6.77 15.314,7.296 16.014,7.296 17.111,6.199 17.111,4.06 17.656,3.514 19.652,3.514 20.547,2.619 20.622,2.545 23.923,2.545 24.035,2.657 24.035,3.421 24.111,3.497 24.859,3.497 25.19,3.166 25.875,3.166 26.829,2.212 26.885,2.156 30.742,2.156 30.855,2.268 30.855,2.726 31.264,3.136 31.429,3.136 ; IC2.95@29.954,5.438 29.954,4.404 30.299,4.06 30.742,4.06 31.096,3.706 31.096,3.469 31.429,3.136 ; v1(40.453,8.748) 40.453,8.719 40.023,8.289 38.809,8.289 37.06,6.54 37.06,2.85 36.635,2.426 35.814,2.426 35.733,2.345 34.054,2.345 33.263,3.136 31.429,3.136
  L4 w0.13: v1(40.453,8.748) 40.473,8.728 40.898,8.728 40.967,8.659 40.997,8.659 41.256,8.4 41.256,8.356 41.493,8.118 J1.B27@42.548,8.118
TIME: J1.A18
TMP1075_A0: IC2.28 IC10.7 | length 57
  L1 w0.127: IC2.28@31.454,20.838 31.454,21.762 31.338,21.878 31.338,22.243 31.523,22.428 31.523,22.801 v1(31.59,22.868) ; IC10.7@44.575,62.8 44.737,62.638 44.737,61.557 45,61.293 45.346,61.293 45.453,61.4 v1(45.9,61.4)
  L3 w0.127: v1(31.59,22.868) 31.59,23.812 32.742,24.963 v1(32.742,33.3) ; v1(45.9,33.3) v1(45.9,61.4)
  L4 w0.127: v1(32.742,33.3) v1(45.9,33.3)
TMS: IC2.90 J1.A28 J6.2 R2.1 | length 46.1
  L1 w0.13: J6.2@11.839,6.033 11.908,6.102 11.908,6.733 v1(11.977,6.802) ; v1(16.692,2.32) 16.744,2.32 17.032,2.031 20.045,2.031 20.302,1.774 24.242,1.774 24.707,2.239 24.86,2.239 25.023,2.076 25.184,2.076 25.194,2.086 v1(25.194,2.005) 25.815,1.385 31.062,1.385 31.09,1.413 36.712,1.413 37.831,2.531 37.831,6.221 38.256,6.647 39.128,7.518 J1.A28@42.748,7.518 ; R2.1@27.275,3.578 v1(27.275,4.205) 27.275,4.305 27.454,4.484 IC2.90@27.454,5.438
  L3 w0.13: v1(11.977,6.802) 12.048,6.732 12.048,6.414 13.31,5.152 15.145,5.152 15.223,5.152 cw(c15.655,4.407) 15.849,5.246 16.491,5.098 16.567,5.022 16.567,3.829 16.279,3.54 16.279,3.174 16.149,3.044 16.149,2.936 16.692,2.393 v1(16.692,2.32) ; v1(25.194,2.005) 25.194,2.04 26.006,2.852 26.006,2.922 26.146,3.062 26.146,3.076 27.175,4.105 27.175,4.205 v1(27.275,4.205)
TRIG: J1.A17
UART_RxD: J1.A25
UART_TxD: J1.B26
VMID_A: IC6.1 IC6.2 R5A.2 R5B.2 R7A.2 R7B.2 R13A.2 R13B.2 R15A.2 R15B.2 | length 39.5
  L1 w0.152: v1(-6.956,83.358) -6.956,82.621 R15A.2@-6.85,82.515 ; R13A.2@-6.85,84.538 -6.645,84.743 v1(-6.068,84.743) ; v1(-6.813,68.832) -6.813,68.095 R15B.2@-6.706,67.989 ; R13B.2@-6.706,70.012 -6.502,70.217 v1(-5.924,70.217) ; v1(-6.7,81) -6.7,80.107 R5A.2@-6.65,80.057 ; R7A.2@-6.6,77.95 -6.587,77.963 v1(-6.587,78.85) ; v1(-6.556,66.474) -6.556,65.581 R5B.2@-6.506,65.531 ; R7B.2@-6.456,63.424 -6.443,63.437 v1(-6.443,64.324) ; IC6.1@-4.465,90.865 v1(-6.068,90.865) -6.068,91.956 -5.924,92.1 -4.499,92.1 IC6.2@-4.465,92.135
  L3 w0.152: v1(-6.443,64.324) -6.5,64.38 -6.5,66.418 v1(-6.556,66.474) -6.556,66.568 -6.813,66.824 v1(-6.813,68.832) -6.813,69.328 v1(-5.924,70.217) -5.924,78.187 v1(-6.587,78.85) -6.644,78.906 -6.644,80.944 v1(-6.7,81) -6.7,81.094 -6.956,81.35 v1(-6.956,83.358) -6.956,83.854 v1(-6.068,84.743) v1(-6.068,90.865)
VMID_B: IC6.6 IC6.7 R5C.2 R5D.2 R7C.2 R7D.2 R13C.2 R13D.2 R15C.2 R15D.2 | length 72.6
  L1 w0.152: IC6.7@-9.865,92.135 -9.83,92.1 v1(-7.7,92.1) -7.7,93.305 -7.8,93.405 IC6.6@-9.865,93.405 ; v1(-6.438,38.948) -6.438,38.211 R15D.2@-6.331,38.104 ; v1(-6.438,52.815) -6.438,52.078 R15C.2@-6.331,51.972 ; R13D.2@-6.331,40.128 -6.126,40.333 v1(-5.549,40.333) ; R13C.2@-6.331,53.995 -6.126,54.2 v1(-5.549,54.2) ; v1(-6.181,36.589) -6.181,35.697 R5D.2@-6.131,35.647 ; v1(-6.181,50.457) -6.181,49.564 R5C.2@-6.131,49.514 ; R7D.2@-6.081,33.539 -6.068,33.552 v1(-6.068,34.439) ; R7C.2@-6.081,47.407 -6.068,47.419 v1(-6.068,48.307)
  L3 w0.152: v1(-7.7,92.1) -7.7,61.544 -5.549,59.392 v1(-5.549,54.2) -6.438,53.311 v1(-6.438,52.815) -6.438,50.807 -6.181,50.551 v1(-6.181,50.457) -6.125,50.4 -6.125,48.363 v1(-6.068,48.307) -6.068,40.852 v1(-5.549,40.333) -6.438,39.444 v1(-6.438,38.948) -6.438,36.94 -6.181,36.683 v1(-6.181,36.589) -6.125,36.533 -6.125,34.496 v1(-6.068,34.439)
pads on no net: B3.1 B4.1 B5.1 B6.1 B7.1 B8.1 IC1.7 IC1.8 IC1.9 IC1.10 IC1.25 IC2.69 IC2.89 IC5.20 IC5.21 IC5.25 IC9.1 IC9.7 IC15.2 IC15.4 IC15.5 IC15.6 IC22.1 IC22.7 J6.Mech LD5.3 LD6.3 LD7.3

## Polygon pours and split planes (outlines as drawn)
P3V3MP on L3 "P3V3MP_L03_P009" (solid, remove dead copper, pour order 9): -28.8,100.101 46.38,100.101 48.4,98.082 48.4,31.9 48,31.5 39.006,31.5 39.006,25.733 39.649,25.09 42.548,25.09 42.548,6.701 42.435,6.588 39.269,6.588 38.702,6.021 38.702,0.543 38.362,0.203 -28.8,0.203 -28.8,8.87 -30.549,10.619 -30.549,89.7 -28.8,91.448
GND on L1 "GND_L01_P007" (solid, pour order 7): -28.8,100.101 46.38,100.101 48.4,98.082 48.4,31.9 48,31.5 38.362,31.5 38.362,25.487 39.148,24.702 42.548,24.702 42.548,6.701 42.435,6.588 39.269,6.588 38.702,6.021 38.702,0.543 38.362,0.203 -28.8,0.203 -28.8,8.87 -30.549,10.619 -30.549,89.7 -28.8,91.448
GND on L4 "GND_L04_P008" (solid, pour order 8): -28.8,100.101 46.38,100.101 48.4,98.082 48.4,31.9 48,31.5 39.006,31.5 39.006,25.733 39.649,25.09 42.548,25.09 42.548,6.701 42.435,6.588 39.269,6.588 38.702,6.021 38.702,0.543 38.362,0.203 -28.8,0.203 -28.8,8.87 -30.549,10.619 -30.549,89.7 -28.8,91.448
GND on P2 (split plane): 48.216,98.475 48.216,31.602 38.688,31.602 38.651,31.599 38.594,31.594 38.576,31.59 38.502,31.572 38.487,31.566 38.415,31.536 38.379,31.514 38.335,31.487 38.3,31.457 38.263,31.425 38.231,31.389 38.201,31.354 38.174,31.309 38.152,31.273 38.122,31.201 38.116,31.186 38.098,31.112 38.094,31.094 38.089,31.037 38.086,31 38.086,26.943 38.086,25.943 38.096,25.764 38.126,25.587 38.176,25.414 38.244,25.248 38.331,25.091 38.435,24.944 38.555,24.81 38.689,24.69 38.836,24.586 38.993,24.499 39.159,24.431 39.332,24.381 39.509,24.351 39.688,24.341 43.689,24.341 44.086,23.944 44.086,7.463 43.689,7.065 39.688,7.065 39.688,7.066 39.509,7.056 39.332,7.026 39.159,6.976 38.993,6.907 38.836,6.82 38.689,6.716 38.555,6.596 38.435,6.462 38.331,6.316 38.244,6.159 38.176,5.993 38.126,5.82 38.096,5.643 38.086,5.463 38.086,1.543 37.146,0.602 0,0.602 -28.58,0.602 -28.58,8.32 -28.587,8.414 -28.609,8.506 -28.645,8.593 -28.695,8.673 -28.756,8.745 -30.58,10.569 -30.58,89.751 -29.756,90.574 -28.756,91.574 -28.695,91.646 -28.645,91.727 -28.609,91.814 -28.587,91.906 -28.58,92 -28.58,99.398 0,99.398 47.294,99.398

## Keep-outs
KeepOutLayer:
  circle w0.05: c10.569,5.398 r0.644
  circle w0.05: c13.744,2.858 r1.288
  circle w0.05: c13.744,7.938 r1.288
  circle w0.05: c15.649,6.414 r0.644
  circle w0.05: c15.655,4.407 r0.644
  circle w0.05: c10.569,7.938 r1.288
  circle w0.05: c10.569,2.858 r1.288

## Silkscreen, mask and mechanical layers (free items; w line width, h text height)
TopOverlay:
  lines w0.254: 39.152,8.223 39.152,24.473
  text "CH0" at -23.053,86.6 h0.9
  text "CH1" at -23.053,78.662 h0.9
  text "CH2" at -22.853,71.245 h0.9
  text "MOD-ADC-10" at 19.739,70.402 h0.9
  text "v1.0" at 22.586,68.321 h0.9
  text "CH3" at -23.388,63.6 h0.9
  text "CH4" at -23.053,55.557 h0.9
  text "CH5" at -23.053,47.591 h0.9
  text "CH6" at -22.853,40.153 h0.9
  text "CH7" at -23.053,32.939 h0.9
  text "P" at -22.7,26.423 h0.9 r90
  text "PWR" at -22.7,22.599 h0.9 r90
  text "N" at -22.7,21.072 h0.9 r90
  text "P" at -22.7,16.844 h0.9 r90
  text "PWR" at -22.7,13.019 h0.9 r90
  text "N" at -22.7,11.492 h0.9 r90
PCB Outline:
  lines w0.1: 38.688,4.463 38.688,1.293 37.395,0 34,0 0,0 -29.182,0 -29.182,8.32 -31.182,10.32 -31.182,90 -30.182,91 -29.182,92 -29.182,100 0,100 34.601,100 46.5,100 47.543,100 48.818,98.724 48.818,31 38.688,31 38.688,26.943
Mechanical13:
  lines w0.05: 38.8,5.163 38.8,5.673 ; 38.8,5.163 38.8,5.163 ; 38.8,5.163 39.3,4.663 ; 38.8,5.164 39.3,4.664 ; 38.8,5.164 38.8,5.164 ; 38.8,5.164 38.8,5.674 ; 38.8,5.673 39.55,6.423 ; 38.8,5.674 39.55,6.424 ; 38.8,25.793 39.55,25.043 ; 38.8,25.793 38.8,26.843 ; 38.8,25.794 38.8,26.844 ; 38.8,25.794 39.55,25.044 ; 38.8,26.843 39.584,26.843 ; 38.8,26.844 39.584,26.844 ; 39.3,4.663 44.73,4.663 39.3,4.664 ; 39.55,6.423 44.73,6.423 ; 39.55,6.423 39.55,6.423 ; 39.55,6.424 39.55,6.424 ; 39.55,6.424 44.73,6.424 ; 39.55,25.043 44.73,25.043 ; 39.55,25.044 44.73,25.044 ; 39.584,26.843 44.75,26.843 39.584,26.844 ; 44.73,6.423 44.73,25.043 ; 44.73,6.424 44.73,25.044

## Text inside footprints (layer, text, board x,y; h text height)
IC15: Mechanical13 "*" at 15.422,25.517 h1.27 r270
J1: TopOverlay "A28" at 38.436,7.018 h1; TopOverlay "A1" at 39.727,23.228 h1; DrillDrawing "2x r 1mm" at 39.956,35.788 h1.2 r90; BottomOverlay "B1" at 40.988,23.218 h1; BottomOverlay "B28" at 40.988,7.018 h1; Mechanical8 "6mm" at 43.636,4.728 h1.2